# EAGLE board 1u_mixer_panel (EAGLE 9.6.2), part 1 of 2
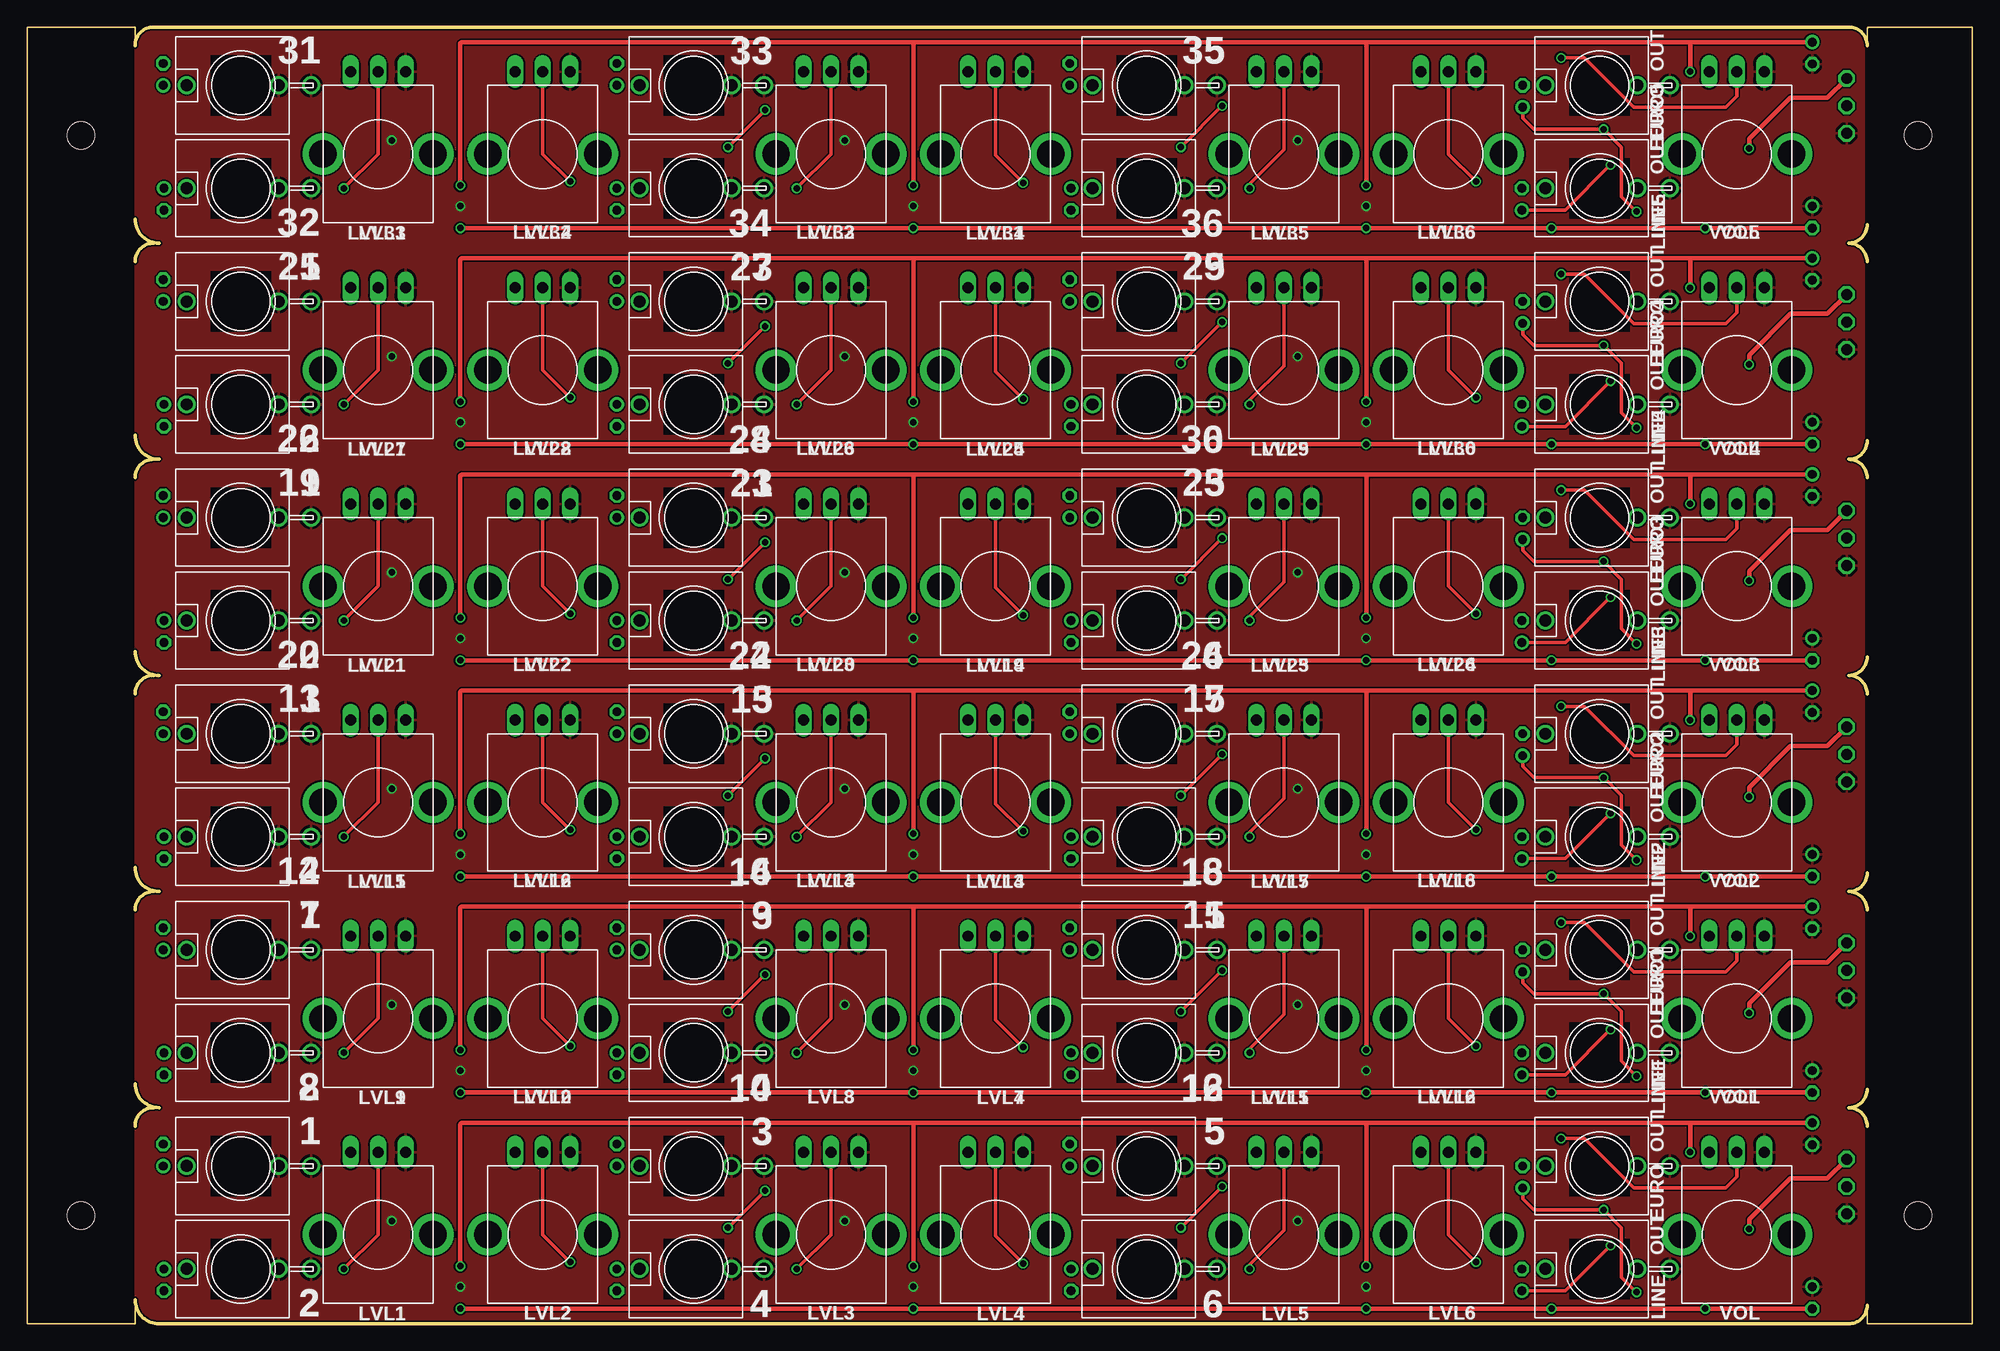
[diagram p0: board, top side]
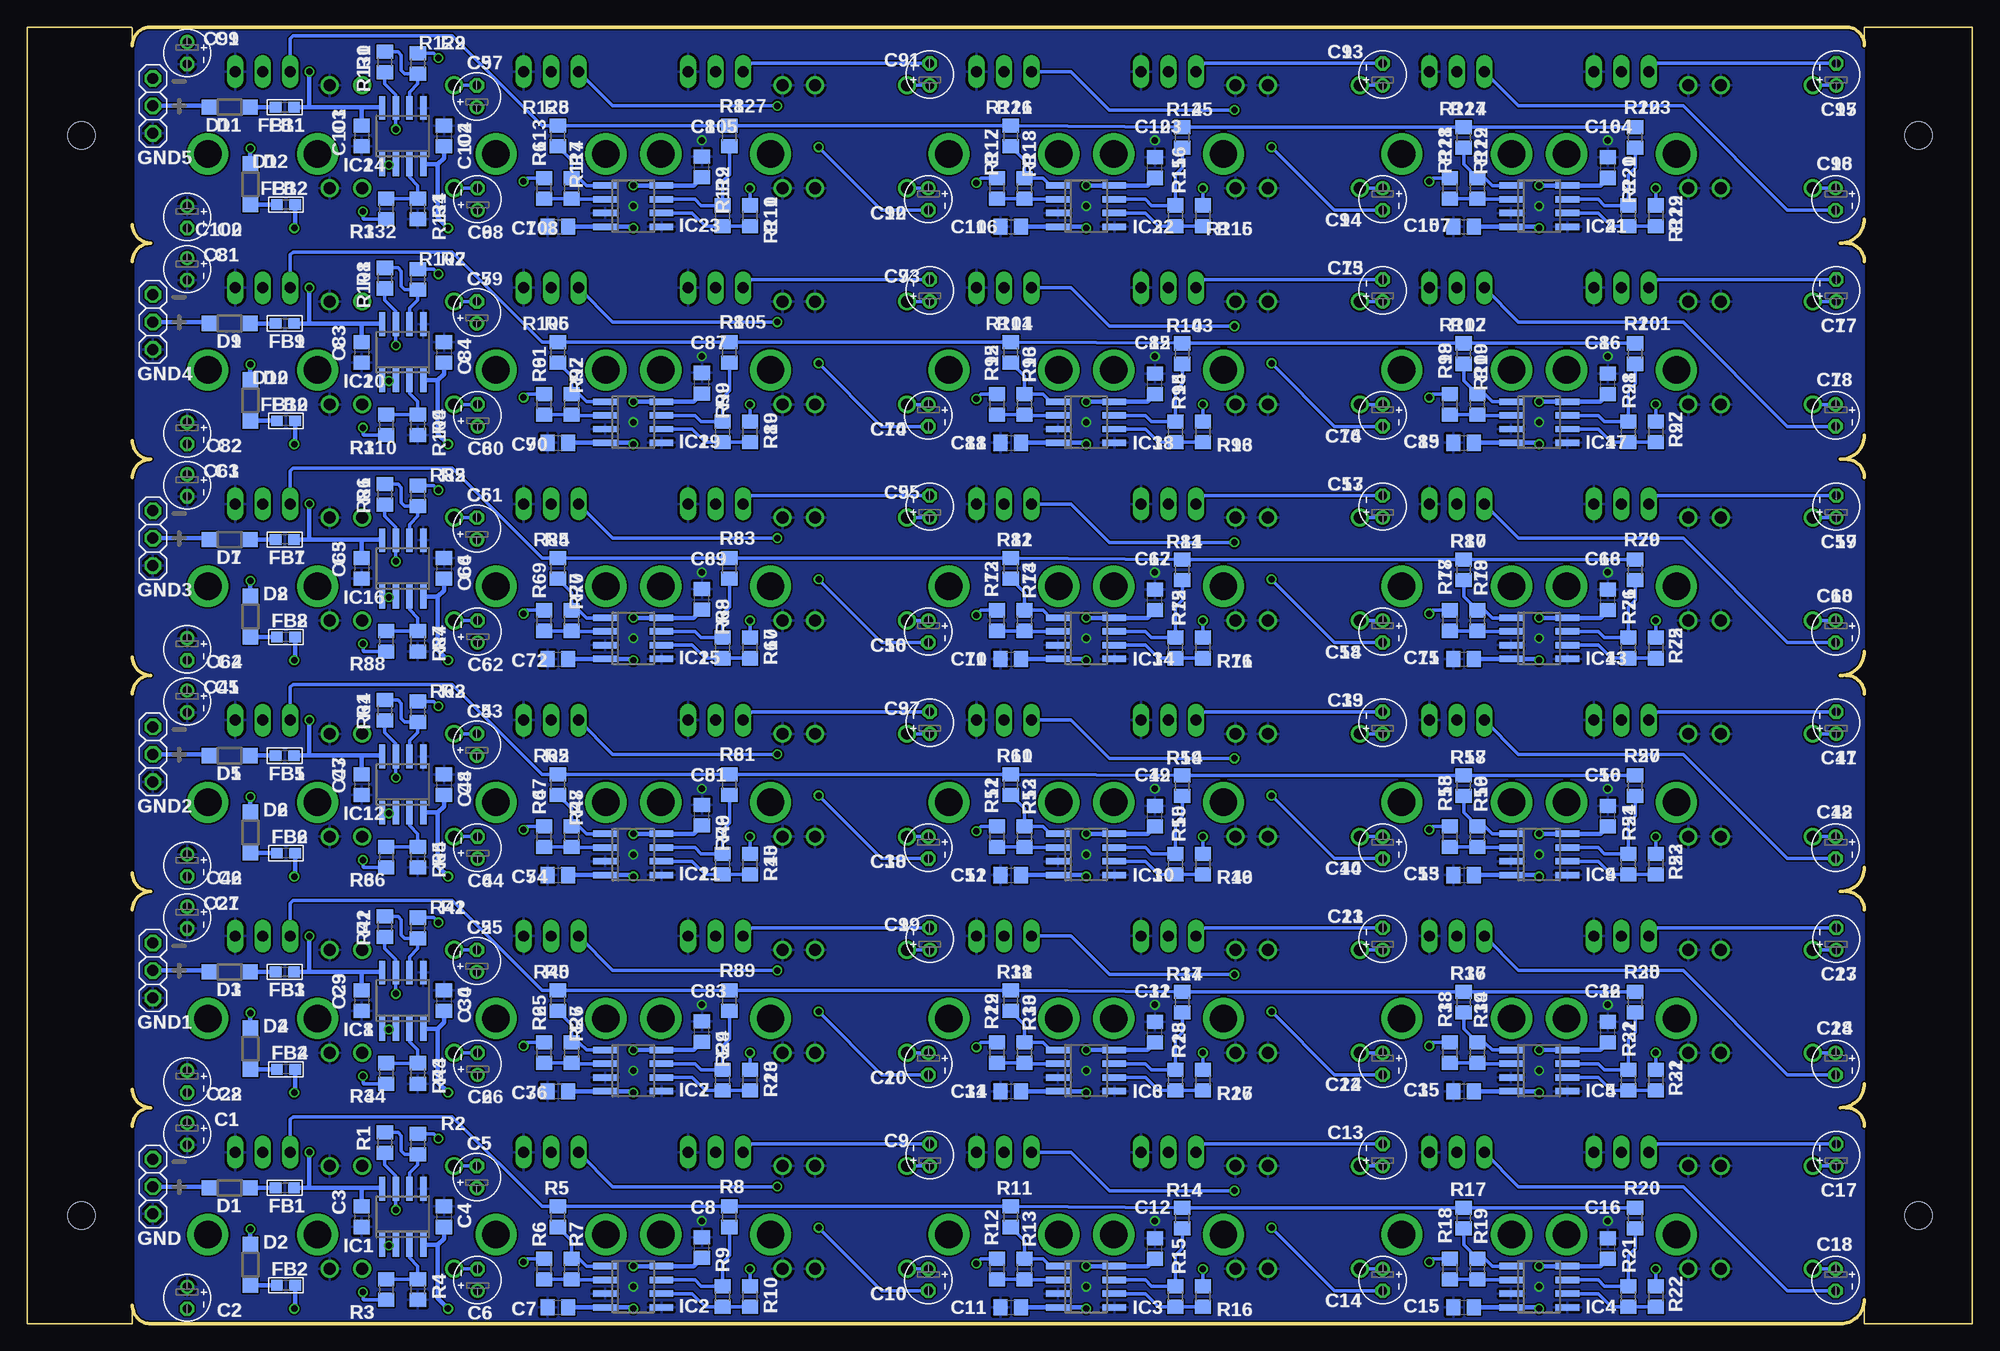
[diagram p1: board, bottom side, seen from below]

Size 180.03 x 120.02 mm. Coordinates in mm from the lower left corner, seen from the top.
Outline: 10,2.22 arc90 12.23,0 168.56,0 arc90 170.28,1.71
Outline: 10,18.29 arc-90 11.72,20
Outline: 170.28,18.29 arc90 168.56,20 arc90 170.28,21.72
Outline: 10,22.23 arc90 12.23,20
Outline: 10,38.29 arc-90 11.72,40.01
Outline: 170.28,38.29 arc90 168.56,40.01 arc90 170.28,41.72
Outline: 10,42.23 arc90 12.23,40.01
Outline: 10,58.29 arc-90 11.72,60.01
Outline: 170.28,58.29 arc90 168.56,60.01 arc90 170.28,61.72
Outline: 10,62.23 arc90 12.23,60.01
Outline: 10,78.3 arc-90 11.72,80.01
Outline: 170.28,78.3 arc90 168.56,80.01 arc90 170.28,81.72
Outline: 10,82.23 arc90 12.23,80.01
Outline: 10,98.3 arc-90 11.72,100.01
Outline: 170.28,98.3 arc90 168.56,100.01 arc90 170.28,101.73
Outline: 10,102.23 arc90 12.23,100.01
Outline: 10,118.3 arc-90 11.72,120.02 168.56,120.02 arc-90 170.28,118.3
Outline: 0,120.02 0,0
Outline: 180.03,120.02 180.03,0
Outline: 0,120 10,120 10,118.36
Outline: 180,120 170.39,120 170.28,119.89 170.28,118.36
Outline: 180,0 170.28,0 170.28,1.65
Outline: 0,0 10,0 10,2.16
Copper layers (1*16): Top 0.035mm / dielectric 1.5mm / Bottom 0.035mm
Design rules "hackvana": minimum track width 6mil, minimum drill 0.3mm, track to track 6mil, track to pad 9mil, pad to pad 6mil, via to via 6mil, smd to smd 0mil, copper to edge 6mil, drill to drill 6mil, minimum pad ring 10mil, minimum via ring 6mil, stop-mask expansion 2mil, vias tented up to drill 100mil, thermal gap 10mil
Holes 2.54 mm at 5,110 5,10 175,110 175,10

## Footprints (pad centres in the part's own frame; a part is rotated, then mirrored left to right if it is on the bottom)
WQP-PJ301M-12_JACK = drill 1.1: P$1 0,5; P$2 0,-3.5; P$3 0,-6.5
1X01 = drill 1.016 octagon: 1 0,0
E2-4 = drill 0.813 pad 1.27: + -1.016,0 | drill 0.813 pad 1.27 octagon: - 1.016,0
C0805 = smd 1.3 x 1.5: 1 -0.95,0; 2 0.95,0
SOD123 = smd 1.4 x 1.4: A 1.9,0; C -1.9,0
0603 = smd 1.1 x 1: 1 -0.85,0; 2 0.85,0
SO08 = smd 0.6 x 2.2: 1 -1.905,-2.6; 2 -0.635,-2.6; 3 0.635,-2.6; 4 1.905,-2.6; 5 1.905,2.6; 6 0.635,2.6; 7 -0.635,2.6; 8 -1.905,2.6
SMALL_ALPS_POT = drill 1.016 long: A -2.54,-7.62; B 2.54,-7.62; W 0,-7.62 | drill 2.54 pad 3.81: GND@1 -5.08,0; GND@2 5.08,0
R0805 = smd 1.3 x 1.5: 1 -0.95,0; 2 0.95,0

## Placement (x,y rotation side)
1  WQP-PJ301M-12_JACK  [WQP-PJ301M-12_JACK]  19.78,14.61 90 top
2  WQP-PJ301M-12_JACK  [WQP-PJ301M-12_JACK]  19.78,5.08 90 top
3  WQP-PJ301M-12_JACK  [WQP-PJ301M-12_JACK]  61.69,14.61 90 top
4  WQP-PJ301M-12_JACK  [WQP-PJ301M-12_JACK]  61.69,5.08 90 top
5  WQP-PJ301M-12_JACK  [WQP-PJ301M-12_JACK]  103.6,14.61 90 top
6  WQP-PJ301M-12_JACK  [WQP-PJ301M-12_JACK]  103.6,5.08 90 top
7  WQP-PJ301M-12_JACK  [WQP-PJ301M-12_JACK]  19.78,34.61 90 top
8  WQP-PJ301M-12_JACK  [WQP-PJ301M-12_JACK]  19.78,25.08 90 top
9  WQP-PJ301M-12_JACK  [WQP-PJ301M-12_JACK]  61.69,34.61 90 top
10  WQP-PJ301M-12_JACK  [WQP-PJ301M-12_JACK]  61.69,25.08 90 top
11  WQP-PJ301M-12_JACK  [WQP-PJ301M-12_JACK]  103.6,34.61 90 top
12  WQP-PJ301M-12_JACK  [WQP-PJ301M-12_JACK]  103.6,25.08 90 top
13  WQP-PJ301M-12_JACK  [WQP-PJ301M-12_JACK]  19.78,54.61 90 top
14  WQP-PJ301M-12_JACK  [WQP-PJ301M-12_JACK]  19.78,45.09 90 top
15  WQP-PJ301M-12_JACK  [WQP-PJ301M-12_JACK]  61.69,54.61 90 top
16  WQP-PJ301M-12_JACK  [WQP-PJ301M-12_JACK]  61.69,45.09 90 top
17  WQP-PJ301M-12_JACK  [WQP-PJ301M-12_JACK]  103.6,54.61 90 top
18  WQP-PJ301M-12_JACK  [WQP-PJ301M-12_JACK]  103.6,45.09 90 top
19  WQP-PJ301M-12_JACK  [WQP-PJ301M-12_JACK]  19.78,74.61 90 top
20  WQP-PJ301M-12_JACK  [WQP-PJ301M-12_JACK]  19.78,65.09 90 top
21  WQP-PJ301M-12_JACK  [WQP-PJ301M-12_JACK]  61.69,74.61 90 top
22  WQP-PJ301M-12_JACK  [WQP-PJ301M-12_JACK]  61.69,65.09 90 top
23  WQP-PJ301M-12_JACK  [WQP-PJ301M-12_JACK]  103.6,74.61 90 top
24  WQP-PJ301M-12_JACK  [WQP-PJ301M-12_JACK]  103.6,65.09 90 top
25  WQP-PJ301M-12_JACK  [WQP-PJ301M-12_JACK]  19.78,94.61 90 top
26  WQP-PJ301M-12_JACK  [WQP-PJ301M-12_JACK]  19.78,85.09 90 top
27  WQP-PJ301M-12_JACK  [WQP-PJ301M-12_JACK]  61.69,94.61 90 top
28  WQP-PJ301M-12_JACK  [WQP-PJ301M-12_JACK]  61.69,85.09 90 top
29  WQP-PJ301M-12_JACK  [WQP-PJ301M-12_JACK]  103.6,94.61 90 top
30  WQP-PJ301M-12_JACK  [WQP-PJ301M-12_JACK]  103.6,85.09 90 top
31  WQP-PJ301M-12_JACK  [WQP-PJ301M-12_JACK]  19.78,114.62 90 top
32  WQP-PJ301M-12_JACK  [WQP-PJ301M-12_JACK]  19.78,105.09 90 top
33  WQP-PJ301M-12_JACK  [WQP-PJ301M-12_JACK]  61.69,114.62 90 top
34  WQP-PJ301M-12_JACK  [WQP-PJ301M-12_JACK]  61.69,105.09 90 top
35  WQP-PJ301M-12_JACK  [WQP-PJ301M-12_JACK]  103.6,114.62 90 top
36  WQP-PJ301M-12_JACK  [WQP-PJ301M-12_JACK]  103.6,105.09 90 top
+1  [1X01]  168.37,32.7 0 bottom
+2  [1X01]  168.37,52.7 0 bottom
+3  [1X01]  168.37,72.71 0 bottom
+4  [1X01]  168.37,92.71 0 bottom
+5  [1X01]  168.37,112.71 0 bottom
+12  [1X01]  168.37,12.7 0 bottom
-1  [1X01]  168.37,35.24 0 bottom
-2  [1X01]  168.37,55.24 0 bottom
-3  [1X01]  168.37,75.25 0 bottom
-4  [1X01]  168.37,95.25 0 bottom
-5  [1X01]  168.37,115.25 0 bottom
-12  [1X01]  168.37,15.24 0 bottom
C1  [E2-4]  165.2,17.59 270 bottom
C2  [E2-4]  165.2,2.41 270 bottom
C3  [C0805]  149.07,9.91 270 bottom
C4  [C0805]  141.45,9.91 270 bottom
C5  [E2-4]  138.4,13.59 90 bottom
C6  [E2-4]  138.34,4.06 90 bottom
C7  [C0805]  130.91,1.52 0 bottom
C8  [C0805]  117.57,7.05 90 bottom
C9  [E2-4]  96.49,15.62 90 bottom
C10  [E2-4]  96.62,4.06 270 bottom
C11  [C0805]  89,1.52 0 bottom
C12  [C0805]  75.66,6.99 90 bottom
C13  [E2-4]  54.58,15.62 90 bottom
C14  [E2-4]  54.58,4.06 270 bottom
C15  [C0805]  47.09,1.52 0 bottom
C16  [C0805]  33.75,6.99 90 bottom
C17  [E2-4]  12.61,15.62 90 bottom
C18  [E2-4]  12.67,4.06 270 bottom
C19  [E2-4]  96.49,35.62 90 bottom
C20  [E2-4]  96.62,24.07 270 bottom
C21  [E2-4]  54.58,35.62 90 bottom
C22  [E2-4]  54.58,24.07 270 bottom
C23  [E2-4]  12.61,35.62 90 bottom
C24  [E2-4]  12.67,24.07 270 bottom
C25  [E2-4]  138.4,33.59 90 bottom
C26  [E2-4]  138.34,24.07 90 bottom
C27  [E2-4]  165.2,37.59 270 bottom
C28  [E2-4]  165.2,22.42 270 bottom
C29  [C0805]  149.07,29.91 270 bottom
C30  [C0805]  141.45,29.91 270 bottom
C31  [C0805]  75.66,26.99 90 bottom
C32  [C0805]  33.75,26.99 90 bottom
C33  [C0805]  117.57,27.05 90 bottom
C34  [C0805]  89,21.53 0 bottom
C35  [C0805]  47.09,21.53 0 bottom
C36  [C0805]  130.91,21.53 0 bottom
C37  [E2-4]  96.49,55.63 90 bottom
C38  [E2-4]  96.62,44.07 270 bottom
C39  [E2-4]  54.58,55.63 90 bottom
C40  [E2-4]  54.58,44.07 270 bottom
C41  [E2-4]  12.61,55.63 90 bottom
C42  [E2-4]  12.67,44.07 270 bottom
C43  [E2-4]  138.4,53.59 90 bottom
C44  [E2-4]  138.34,44.07 90 bottom
C45  [E2-4]  165.2,57.59 270 bottom
C46  [E2-4]  165.2,42.42 270 bottom
C47  [C0805]  149.07,49.91 270 bottom
C48  [C0805]  141.45,49.91 270 bottom
C49  [C0805]  75.66,46.99 90 bottom
C50  [C0805]  33.75,46.99 90 bottom
C51  [C0805]  117.57,47.05 90 bottom
C52  [C0805]  89,41.53 0 bottom
C53  [C0805]  47.09,41.53 0 bottom
C54  [C0805]  130.91,41.53 0 bottom
C55  [E2-4]  96.49,75.63 90 bottom
C56  [E2-4]  96.62,64.07 270 bottom
C57  [E2-4]  54.58,75.63 90 bottom
C58  [E2-4]  54.58,64.07 270 bottom
C59  [E2-4]  12.61,75.63 90 bottom
C60  [E2-4]  12.67,64.07 270 bottom
C61  [E2-4]  138.4,73.6 90 bottom
C62  [E2-4]  138.34,64.07 90 bottom
C63  [E2-4]  165.2,77.6 270 bottom
C64  [E2-4]  165.2,62.42 270 bottom
C65  [C0805]  149.07,69.91 270 bottom
C66  [C0805]  141.45,69.91 270 bottom
C67  [C0805]  75.66,66.99 90 bottom
C68  [C0805]  33.75,66.99 90 bottom
C69  [C0805]  117.57,67.06 90 bottom
C70  [C0805]  89,61.53 0 bottom
C71  [C0805]  47.09,61.53 0 bottom
C72  [C0805]  130.91,61.53 0 bottom
C73  [E2-4]  96.49,95.63 90 bottom
C74  [E2-4]  96.62,84.07 270 bottom
C75  [E2-4]  54.58,95.63 90 bottom
C76  [E2-4]  54.58,84.07 270 bottom
C77  [E2-4]  12.61,95.63 90 bottom
C78  [E2-4]  12.67,84.07 270 bottom
C79  [E2-4]  138.4,93.6 90 bottom
C80  [E2-4]  138.34,84.07 90 bottom
C81  [E2-4]  165.2,97.6 270 bottom
C82  [E2-4]  165.2,82.42 270 bottom
C83  [C0805]  149.07,89.92 270 bottom
C84  [C0805]  141.45,89.92 270 bottom
C85  [C0805]  75.66,87 90 bottom
C86  [C0805]  33.75,87 90 bottom
C87  [C0805]  117.57,87.06 90 bottom
C88  [C0805]  89,81.53 0 bottom
C89  [C0805]  47.09,81.53 0 bottom
C90  [C0805]  130.91,81.53 0 bottom
C91  [E2-4]  96.49,115.63 90 bottom
C92  [E2-4]  96.62,104.08 270 bottom
C93  [E2-4]  54.58,115.63 90 bottom
C94  [E2-4]  54.58,104.08 270 bottom
C95  [E2-4]  12.61,115.63 90 bottom
C96  [E2-4]  12.67,104.08 270 bottom
C97  [E2-4]  138.4,113.6 90 bottom
C98  [E2-4]  138.34,104.08 90 bottom
C99  [E2-4]  165.2,117.6 270 bottom
C100  [E2-4]  165.2,102.43 270 bottom
C101  [C0805]  149.07,109.92 270 bottom
C102  [C0805]  141.45,109.92 270 bottom
C103  [C0805]  75.66,107 90 bottom
C104  [C0805]  33.75,107 90 bottom
C105  [C0805]  117.57,107.06 90 bottom
C106  [C0805]  89,101.54 0 bottom
C107  [C0805]  47.09,101.54 0 bottom
C108  [C0805]  130.91,101.54 0 bottom
D1  MBR0520LT  [SOD123]  161.26,12.57 180 bottom
D2  MBR0520LT  [SOD123]  159.35,5.46 270 bottom
D3  MBR0520LT  [SOD123]  161.26,32.58 180 bottom
D4  MBR0520LT  [SOD123]  159.35,25.46 270 bottom
D5  MBR0520LT  [SOD123]  161.26,52.58 180 bottom
D6  MBR0520LT  [SOD123]  159.35,45.47 270 bottom
D7  MBR0520LT  [SOD123]  161.26,72.58 180 bottom
D8  MBR0520LT  [SOD123]  159.35,65.47 270 bottom
D9  MBR0520LT  [SOD123]  161.26,92.58 180 bottom
D10  MBR0520LT  [SOD123]  159.35,85.47 270 bottom
D11  MBR0520LT  [SOD123]  161.26,112.59 180 bottom
D12  MBR0520LT  [SOD123]  159.35,105.47 270 bottom
EURO  WQP-PJ301M-12_JACK  [WQP-PJ301M-12_JACK]  145.51,14.61 90 top
EURO1  WQP-PJ301M-12_JACK  [WQP-PJ301M-12_JACK]  145.51,34.61 90 top
EURO2  WQP-PJ301M-12_JACK  [WQP-PJ301M-12_JACK]  145.51,54.61 90 top
EURO3  WQP-PJ301M-12_JACK  [WQP-PJ301M-12_JACK]  145.51,74.61 90 top
EURO4  WQP-PJ301M-12_JACK  [WQP-PJ301M-12_JACK]  145.51,94.61 90 top
EURO5  WQP-PJ301M-12_JACK  [WQP-PJ301M-12_JACK]  145.51,114.62 90 top
FB1  [0603]  156.18,12.57 180 bottom
FB2  [0603]  156.05,3.56 180 bottom
FB3  [0603]  156.18,32.58 180 bottom
FB4  [0603]  156.05,23.56 180 bottom
FB5  [0603]  156.18,52.58 180 bottom
FB6  [0603]  156.05,43.56 180 bottom
FB7  [0603]  156.18,72.58 180 bottom
FB8  [0603]  156.05,63.56 180 bottom
FB9  [0603]  156.18,92.58 180 bottom
FB10  [0603]  156.05,83.57 180 bottom
FB11  [0603]  156.18,112.59 180 bottom
FB12  [0603]  156.05,103.57 180 bottom
GND  [1X01]  168.37,10.16 0 bottom
GND1  [1X01]  168.37,30.16 0 bottom
GND2  [1X01]  168.37,50.16 0 bottom
GND3  [1X01]  168.37,70.17 0 bottom
GND4  [1X01]  168.37,90.17 0 bottom
GND5  [1X01]  168.37,110.17 0 bottom
IC1  TL072D  [SO08]  145.26,9.91 0 bottom
IC2  TL072D  [SO08]  123.92,3.43 270 bottom
IC3  TL072D  [SO08]  82.01,3.43 270 bottom
IC4  TL072D  [SO08]  40.1,3.43 270 bottom
IC5  TL072D  [SO08]  40.1,23.43 270 bottom
IC6  TL072D  [SO08]  82.01,23.43 270 bottom
IC7  TL072D  [SO08]  123.92,23.43 270 bottom
IC8  TL072D  [SO08]  145.26,29.91 0 bottom
IC9  TL072D  [SO08]  40.1,43.43 270 bottom
IC10  TL072D  [SO08]  82.01,43.43 270 bottom
IC11  TL072D  [SO08]  123.92,43.43 270 bottom
IC12  TL072D  [SO08]  145.26,49.91 0 bottom
IC13  TL072D  [SO08]  40.1,63.44 270 bottom
IC14  TL072D  [SO08]  82.01,63.44 270 bottom
IC15  TL072D  [SO08]  123.92,63.44 270 bottom
IC16  TL072D  [SO08]  145.26,69.91 0 bottom
IC17  TL072D  [SO08]  40.1,83.44 270 bottom
IC18  TL072D  [SO08]  82.01,83.44 270 bottom
IC19  TL072D  [SO08]  123.92,83.44 270 bottom
IC20  TL072D  [SO08]  145.26,89.92 0 bottom
IC21  TL072D  [SO08]  40.1,103.44 270 bottom
IC22  TL072D  [SO08]  82.01,103.44 270 bottom
IC23  TL072D  [SO08]  123.92,103.44 270 bottom
IC24  TL072D  [SO08]  145.26,109.92 0 bottom
LINE  WQP-PJ301M-12_JACK  [WQP-PJ301M-12_JACK]  145.51,5.08 90 top
LINE1  WQP-PJ301M-12_JACK  [WQP-PJ301M-12_JACK]  145.51,25.08 90 top
LINE2  WQP-PJ301M-12_JACK  [WQP-PJ301M-12_JACK]  145.51,45.09 90 top
LINE3  WQP-PJ301M-12_JACK  [WQP-PJ301M-12_JACK]  145.51,65.09 90 top
LINE4  WQP-PJ301M-12_JACK  [WQP-PJ301M-12_JACK]  145.51,85.09 90 top
LINE5  WQP-PJ301M-12_JACK  [WQP-PJ301M-12_JACK]  145.51,105.09 90 top
LVL1  ALPS_POT_SMALL  [SMALL_ALPS_POT]  32.48,8.26 180 top
LVL2  ALPS_POT_SMALL  [SMALL_ALPS_POT]  47.72,8.26 180 top
LVL3  ALPS_POT_SMALL  [SMALL_ALPS_POT]  74.39,8.26 180 top
LVL4  ALPS_POT_SMALL  [SMALL_ALPS_POT]  89.63,8.26 180 top
LVL5  ALPS_POT_SMALL  [SMALL_ALPS_POT]  116.3,8.26 180 top
LVL6  ALPS_POT_SMALL  [SMALL_ALPS_POT]  131.54,8.26 180 top
LVL7  ALPS_POT_SMALL  [SMALL_ALPS_POT]  89.63,28.26 180 top
LVL8  ALPS_POT_SMALL  [SMALL_ALPS_POT]  74.39,28.26 180 top
LVL9  ALPS_POT_SMALL  [SMALL_ALPS_POT]  32.48,28.26 180 top
LVL10  ALPS_POT_SMALL  [SMALL_ALPS_POT]  47.72,28.26 180 top
LVL11  ALPS_POT_SMALL  [SMALL_ALPS_POT]  116.3,28.26 180 top
LVL12  ALPS_POT_SMALL  [SMALL_ALPS_POT]  131.54,28.26 180 top
LVL13  ALPS_POT_SMALL  [SMALL_ALPS_POT]  89.63,48.26 180 top
LVL14  ALPS_POT_SMALL  [SMALL_ALPS_POT]  74.39,48.26 180 top
LVL15  ALPS_POT_SMALL  [SMALL_ALPS_POT]  32.48,48.26 180 top
LVL16  ALPS_POT_SMALL  [SMALL_ALPS_POT]  47.72,48.26 180 top
LVL17  ALPS_POT_SMALL  [SMALL_ALPS_POT]  116.3,48.26 180 top
LVL18  ALPS_POT_SMALL  [SMALL_ALPS_POT]  131.54,48.26 180 top
LVL19  ALPS_POT_SMALL  [SMALL_ALPS_POT]  89.63,68.26 180 top
LVL20  ALPS_POT_SMALL  [SMALL_ALPS_POT]  74.39,68.26 180 top
LVL21  ALPS_POT_SMALL  [SMALL_ALPS_POT]  32.48,68.26 180 top
LVL22  ALPS_POT_SMALL  [SMALL_ALPS_POT]  47.72,68.26 180 top
LVL23  ALPS_POT_SMALL  [SMALL_ALPS_POT]  116.3,68.26 180 top
LVL24  ALPS_POT_SMALL  [SMALL_ALPS_POT]  131.54,68.26 180 top
LVL25  ALPS_POT_SMALL  [SMALL_ALPS_POT]  89.63,88.27 180 top
LVL26  ALPS_POT_SMALL  [SMALL_ALPS_POT]  74.39,88.27 180 top
LVL27  ALPS_POT_SMALL  [SMALL_ALPS_POT]  32.48,88.27 180 top
LVL28  ALPS_POT_SMALL  [SMALL_ALPS_POT]  47.72,88.27 180 top
LVL29  ALPS_POT_SMALL  [SMALL_ALPS_POT]  116.3,88.27 180 top
LVL30  ALPS_POT_SMALL  [SMALL_ALPS_POT]  131.54,88.27 180 top
LVL31  ALPS_POT_SMALL  [SMALL_ALPS_POT]  89.63,108.27 180 top
LVL32  ALPS_POT_SMALL  [SMALL_ALPS_POT]  74.39,108.27 180 top
LVL33  ALPS_POT_SMALL  [SMALL_ALPS_POT]  32.48,108.27 180 top
LVL34  ALPS_POT_SMALL  [SMALL_ALPS_POT]  47.72,108.27 180 top
LVL35  ALPS_POT_SMALL  [SMALL_ALPS_POT]  116.3,108.27 180 top
LVL36  ALPS_POT_SMALL  [SMALL_ALPS_POT]  131.54,108.27 180 top
R1  100k  [R0805]  146.91,16.76 270 bottom
R2  10k  [R0805]  143.86,16.64 270 bottom
R3  47k  [R0805]  146.78,3.17 90 bottom
R4  10k  [R0805]  143.86,3.17 90 bottom
R5  [R0805]  130.91,9.91 90 bottom
R6  4k7  [R0805]  132.18,5.08 270 bottom
R7  10k  [R0805]  129.64,5.08 90 bottom
R8  [R0805]  115.03,9.91 90 bottom
R9  10k  [R0805]  115.67,2.54 90 bottom
R10  4k7  [R0805]  113.13,2.54 270 bottom
R11  [R0805]  89,9.91 90 bottom
R12  4k7  [R0805]  90.27,5.08 270 bottom
R13  10k  [R0805]  87.73,5.08 90 bottom
R14  [R0805]  73.12,9.78 90 bottom
R15  10k  [R0805]  73.76,2.54 90 bottom
R16  4k7  [R0805]  71.22,2.54 270 bottom
R17  [R0805]  47.09,9.78 90 bottom
R18  4k7  [R0805]  48.36,5.08 270 bottom
R19  10k  [R0805]  45.82,5.08 90 bottom
R20  [R0805]  31.21,9.78 90 bottom
R21  10k  [R0805]  31.85,2.54 90 bottom
R22  4k7  [R0805]  29.31,2.54 270 bottom
R23  4k7  [R0805]  113.13,22.54 270 bottom
R24  10k  [R0805]  115.67,22.54 90 bottom
R25  4k7  [R0805]  132.18,25.08 270 bottom
R26  10k  [R0805]  129.64,25.08 90 bottom
R27  4k7  [R0805]  71.22,22.54 270 bottom
R28  10k  [R0805]  73.76,22.54 90 bottom
R29  4k7  [R0805]  90.27,25.08 270 bottom
R30  10k  [R0805]  87.73,25.08 90 bottom
R31  4k7  [R0805]  29.31,22.54 270 bottom
R32  10k  [R0805]  31.85,22.54 90 bottom
R33  4k7  [R0805]  48.36,25.08 270 bottom
R34  10k  [R0805]  45.82,25.08 90 bottom
R35  [R0805]  31.21,29.78 90 bottom
R36  [R0805]  47.09,29.78 90 bottom
R37  [R0805]  73.12,29.78 90 bottom
R38  [R0805]  89,29.91 90 bottom
R39  [R0805]  115.03,29.91 90 bottom
R40  [R0805]  130.91,29.91 90 bottom
R41  10k  [R0805]  143.86,36.64 270 bottom
R42  100k  [R0805]  146.91,36.77 270 bottom
R43  10k  [R0805]  143.86,23.18 90 bottom
R44  47k  [R0805]  146.78,23.18 90 bottom
R45  4k7  [R0805]  113.13,42.55 270 bottom
R46  10k  [R0805]  115.67,42.55 90 bottom
R47  4k7  [R0805]  132.18,45.09 270 bottom
R48  10k  [R0805]  129.64,45.09 90 bottom
R49  4k7  [R0805]  71.22,42.55 270 bottom
R50  10k  [R0805]  73.76,42.55 90 bottom
R51  4k7  [R0805]  90.27,45.09 270 bottom
R52  10k  [R0805]  87.73,45.09 90 bottom
R53  4k7  [R0805]  29.31,42.55 270 bottom
R54  10k  [R0805]  31.85,42.55 90 bottom
R55  4k7  [R0805]  48.36,45.09 270 bottom
R56  10k  [R0805]  45.82,45.09 90 bottom
R57  [R0805]  31.21,49.78 90 bottom
R58  [R0805]  47.09,49.78 90 bottom
R59  [R0805]  73.12,49.78 90 bottom
R60  [R0805]  89,49.91 90 bottom
R61  [R0805]  115.03,49.91 90 bottom
R62  [R0805]  130.91,49.91 90 bottom
R63  10k  [R0805]  143.86,56.64 270 bottom
R64  100k  [R0805]  146.91,56.77 270 bottom
R65  10k  [R0805]  143.86,43.18 90 bottom
R66  47k  [R0805]  146.78,43.18 90 bottom
R67  4k7  [R0805]  113.13,62.55 270 bottom
R68  10k  [R0805]  115.67,62.55 90 bottom
R69  4k7  [R0805]  132.18,65.09 270 bottom
R70  10k  [R0805]  129.64,65.09 90 bottom
R71  4k7  [R0805]  71.22,62.55 270 bottom
R72  10k  [R0805]  73.76,62.55 90 bottom
R73  4k7  [R0805]  90.27,65.09 270 bottom
R74  10k  [R0805]  87.73,65.09 90 bottom
R75  4k7  [R0805]  29.31,62.55 270 bottom
R76  10k  [R0805]  31.85,62.55 90 bottom
R77  4k7  [R0805]  48.36,65.09 270 bottom
R78  10k  [R0805]  45.82,65.09 90 bottom
R79  [R0805]  31.21,69.79 90 bottom
R80  [R0805]  47.09,69.79 90 bottom
R81  [R0805]  73.12,69.79 90 bottom
R82  [R0805]  89,69.91 90 bottom
R83  [R0805]  115.03,69.91 90 bottom
R84  [R0805]  130.91,69.91 90 bottom
R85  10k  [R0805]  143.86,76.64 270 bottom
R86  100k  [R0805]  146.91,76.77 270 bottom
R87  10k  [R0805]  143.86,63.18 90 bottom
R88  47k  [R0805]  146.78,63.18 90 bottom
R89  4k7  [R0805]  113.13,82.55 270 bottom
R90  10k  [R0805]  115.67,82.55 90 bottom
R91  4k7  [R0805]  132.18,85.09 270 bottom
R92  10k  [R0805]  129.64,85.09 90 bottom
R93  4k7  [R0805]  71.22,82.55 270 bottom
R94  10k  [R0805]  73.76,82.55 90 bottom
R95  4k7  [R0805]  90.27,85.09 270 bottom
R96  10k  [R0805]  87.73,85.09 90 bottom
R97  4k7  [R0805]  29.31,82.55 270 bottom
R98  10k  [R0805]  31.85,82.55 90 bottom
R99  4k7  [R0805]  48.36,85.09 270 bottom
R100  10k  [R0805]  45.82,85.09 90 bottom
R101  [R0805]  31.21,89.79 90 bottom
R102  [R0805]  47.09,89.79 90 bottom
R103  [R0805]  73.12,89.79 90 bottom
R104  [R0805]  89,89.92 90 bottom
R105  [R0805]  115.03,89.92 90 bottom
R106  [R0805]  130.91,89.92 90 bottom
R107  10k  [R0805]  143.86,96.65 270 bottom
R108  100k  [R0805]  146.91,96.77 270 bottom
R109  10k  [R0805]  143.86,83.19 90 bottom
R110  47k  [R0805]  146.78,83.19 90 bottom
R111  4k7  [R0805]  113.13,102.55 270 bottom
R112  10k  [R0805]  115.67,102.55 90 bottom
R113  4k7  [R0805]  132.18,105.09 270 bottom
R114  10k  [R0805]  129.64,105.09 90 bottom
R115  4k7  [R0805]  71.22,102.55 270 bottom
R116  10k  [R0805]  73.76,102.55 90 bottom
R117  4k7  [R0805]  90.27,105.09 270 bottom
R118  10k  [R0805]  87.73,105.09 90 bottom
R119  4k7  [R0805]  29.31,102.55 270 bottom
R120  10k  [R0805]  31.85,102.55 90 bottom
R121  4k7  [R0805]  48.36,105.09 270 bottom
R122  10k  [R0805]  45.82,105.09 90 bottom
R123  [R0805]  31.21,109.79 90 bottom
R124  [R0805]  47.09,109.79 90 bottom
R125  [R0805]  73.12,109.79 90 bottom
R126  [R0805]  89,109.92 90 bottom
R127  [R0805]  115.03,109.92 90 bottom
R128  [R0805]  130.91,109.92 90 bottom
R129  10k  [R0805]  143.86,116.65 270 bottom
R130  100k  [R0805]  146.91,116.78 270 bottom
R131  10k  [R0805]  143.86,103.19 90 bottom
R132  47k  [R0805]  146.78,103.19 90 bottom
VOL  ALPS_POT_SMALL  [SMALL_ALPS_POT]  158.21,8.26 180 top
VOL1  ALPS_POT_SMALL  [SMALL_ALPS_POT]  158.21,28.26 180 top
VOL2  ALPS_POT_SMALL  [SMALL_ALPS_POT]  158.21,48.26 180 top
VOL3  ALPS_POT_SMALL  [SMALL_ALPS_POT]  158.21,68.26 180 top
VOL4  ALPS_POT_SMALL  [SMALL_ALPS_POT]  158.21,88.27 180 top
VOL5  ALPS_POT_SMALL  [SMALL_ALPS_POT]  158.21,108.27 180 top

## Library data of the parts
1-36 EURO EURO1-EURO5 LINE LINE1-LINE5 = thonkiconn
+1-+5 +12 -1--5 -12 GND GND1-GND5 = pinhead
C1 C2 C5 C6 C9 C10 C13 C14 C17-C28 C37-C46 C55-C64 C73-C82 C91-C100 = resistor
C3 C4 C7 C8 C11 C12 C15 C16 C29-C36 C47-C54 C65-C72 C83-C90 C101-C108 R1-R132 = rcl
D1-D12 = diode
FB1-FB12 = microbuilder
IC1-IC24 = linear
LVL1-LVL36 VOL VOL1-VOL5 = jasons_stuff

## Nets
+12V: C1.+ C3.1 C8.1 C12.1 C16.1 FB1.1 IC1.8 IC2.8 IC3.8 IC4.8
+12V1: C27.+ C29.1 C31.1 C32.1 C33.1 FB3.1 IC5.8 IC6.8 IC7.8 IC8.8
+12V2: C45.+ C47.1 C49.1 C50.1 C51.1 FB5.1 IC9.8 IC10.8 IC11.8 IC12.8
+12V3: C63.+ C65.1 C67.1 C68.1 C69.1 FB7.1 IC13.8 IC14.8 IC15.8 IC16.8
+12V4: C81.+ C83.1 C85.1 C86.1 C87.1 FB9.1 IC17.8 IC18.8 IC19.8 IC20.8
+12V5: C99.+ C101.1 C103.1 C104.1 C105.1 FB11.1 IC21.8 IC22.8 IC23.8 IC24.8
-12V: C2.- C4.2 C7.2 C11.2 C15.2 FB2.1 IC1.4 IC2.4 IC3.4 IC4.4
-12V1: C28.- C30.2 C34.2 C35.2 C36.2 FB4.1 IC5.4 IC6.4 IC7.4 IC8.4
-12V2: C46.- C48.2 C52.2 C53.2 C54.2 FB6.1 IC9.4 IC10.4 IC11.4 IC12.4
-12V3: C64.- C66.2 C70.2 C71.2 C72.2 FB8.1 IC13.4 IC14.4 IC15.4 IC16.4
-12V4: C82.- C84.2 C88.2 C89.2 C90.2 FB10.1 IC17.4 IC18.4 IC19.4 IC20.4
-12V5: C100.- C102.2 C106.2 C107.2 C108.2 FB12.1 IC21.4 IC22.4 IC23.4 IC24.4
CH1: IC4.7 R20.1 R21.2
CH2: IC4.1 R17.1 R19.2
CH3: IC3.7 R14.1 R15.2
CH4: IC3.1 R11.1 R13.2
CH5: IC2.7 R8.1 R9.2
CH6: IC2.1 R5.1 R7.2
CH7: IC5.7 R32.2 R35.1
CH8: IC5.1 R34.2 R36.1
CH9: IC6.7 R28.2 R37.1
CH10: IC6.1 R30.2 R38.1
CH11: IC7.7 R24.2 R39.1
CH12: IC7.1 R26.2 R40.1
CH13: IC9.7 R54.2 R57.1
CH14: IC9.1 R56.2 R58.1
CH15: IC10.7 R50.2 R59.1
CH16: IC10.1 R52.2 R60.1
CH17: IC11.7 R46.2 R61.1
CH18: IC11.1 R48.2 R62.1
CH19: IC13.7 R76.2 R79.1
CH20: IC13.1 R78.2 R80.1
CH21: IC14.7 R72.2 R81.1
CH22: IC14.1 R74.2 R82.1
CH23: IC15.7 R68.2 R83.1
CH24: IC15.1 R70.2 R84.1
CH25: IC17.7 R98.2 R101.1
CH26: IC17.1 R100.2 R102.1
CH27: IC18.7 R94.2 R103.1
CH28: IC18.1 R96.2 R104.1
CH29: IC19.7 R90.2 R105.1
CH30: IC19.1 R92.2 R106.1
CH31: IC21.7 R120.2 R123.1
CH32: IC21.1 R122.2 R124.1
CH33: IC22.7 R116.2 R125.1
CH34: IC22.1 R118.2 R126.1
CH35: IC23.7 R112.2 R127.1
CH36: IC23.1 R114.2 R128.1
GND: 1.P$2 1.P$3 2.P$2 2.P$3 3.P$2 3.P$3 4.P$2 4.P$3 5.P$2 5.P$3 6.P$2 6.P$3 7.P$2 7.P$3 8.P$2 8.P$3 9.P$2 9.P$3 10.P$2 10.P$3 11.P$2 11.P$3 12.P$2 12.P$3 13.P$2 13.P$3 14.P$2 14.P$3 15.P$2 15.P$3 16.P$2 16.P$3 17.P$2 17.P$3 18.P$2 18.P$3 19.P$2 19.P$3 20.P$2 20.P$3 21.P$2 21.P$3 22.P$2 22.P$3 23.P$2 23.P$3 24.P$2 24.P$3 25.P$2 25.P$3 26.P$2 26.P$3 27.P$2 27.P$3 28.P$2 28.P$3 29.P$2 29.P$3 30.P$2 30.P$3 31.P$2 31.P$3 32.P$2 32.P$3 33.P$2 33.P$3 34.P$2 34.P$3 35.P$2 35.P$3 36.P$2 36.P$3 C1.- C2.+ C3.2 C4.1 C7.1 C8.2 C11.1 C12.2 C15.1 C16.2 C27.- C28.+ C29.2 C30.1 C31.2 C32.2 C33.2 C34.1 C35.1 C36.1 C45.- C46.+ C47.2 C48.1 C49.2 C50.2 C51.2 C52.1 C53.1 C54.1 C63.- C64.+ C65.2 C66.1 C67.2 C68.2 C69.2 C70.1 C71.1 C72.1 C81.- C82.+ C83.2 C84.1 C85.2 C86.2 C87.2 C88.1 C89.1 C90.1 C99.- C100.+ C101.2 C102.1 C103.2 C104.2 C105.2 C106.1 C107.1 C108.1 EURO1.P$3 EURO2.P$3 EURO3.P$3 EURO4.P$3 EURO5.P$3 EURO.P$3 GND1.1 GND2.1 GND3.1 GND4.1 GND5.1 GND.1 IC1.5 IC2.3 IC2.5 IC3.3 IC3.5 IC4.3 IC4.5 IC5.3 IC5.5 IC6.3 IC6.5 IC7.3 IC7.5 IC8.5 IC9.3 IC9.5 IC10.3 IC10.5 IC11.3 IC11.5 IC12.5 IC13.3 IC13.5 IC14.3 IC14.5 IC15.3 IC15.5 IC16.5 IC17.3 IC17.5 IC18.3 IC18.5 IC19.3 IC19.5 IC20.5 IC21.3 IC21.5 IC22.3 IC22.5 IC23.3 IC23.5 IC24.5 LINE1.P$3 LINE2.P$3 LINE3.P$3 LINE4.P$3 LINE5.P$3 LINE.P$3 LVL1.A LVL2.A LVL3.A LVL4.A LVL5.A LVL6.A LVL7.A LVL8.A LVL9.A LVL10.A LVL11.A LVL12.A LVL13.A LVL14.A LVL15.A LVL16.A LVL17.A LVL18.A LVL19.A LVL20.A LVL21.A LVL22.A LVL23.A LVL24.A LVL25.A LVL26.A LVL27.A LVL28.A LVL29.A LVL30.A LVL31.A LVL32.A LVL33.A LVL34.A LVL35.A LVL36.A R4.1 R43.1 R65.1 R87.1 R109.1 R131.1 VOL1.A VOL2.A VOL3.A VOL4.A VOL5.A VOL.A
N$1: 5.P$1 C9.+
N$2: C9.- LVL5.B
N$3: IC2.6 R9.1 R10.2
N$4: LVL5.W R10.1
N$5: 6.P$1 C10.+
N$6: C10.- LVL6.B
N$7: IC2.2 R6.2 R7.1
N$8: LVL6.W R6.1
N$9: 3.P$1 C13.+
N$10: C13.- LVL3.B
N$11: IC3.6 R15.1 R16.2
N$12: LVL3.W R16.1
N$13: 4.P$1 C14.+
N$14: C14.- LVL4.B
N$15: IC3.2 R12.2 R13.1
N$16: LVL4.W R12.1
N$17: 1.P$1 C17.+
N$18: C17.- LVL1.B
N$19: IC4.6 R21.1 R22.2
N$20: LVL1.W R22.1
N$21: 2.P$1 C18.+
N$22: C18.- LVL2.B
N$23: IC4.2 R18.2 R19.1
N$24: LVL2.W R18.1
N$25: R5.2 R8.2 R11.2 R14.2 R17.2 R20.2 VOL.B
N$26: C5.- EURO.P$1
N$27: C6.- LINE.P$1
N$28: R2.1 VOL.W
N$29: IC1.6 R1.1 R2.2
N$30: C5.+ IC1.7 R1.2 R3.1
N$31: D1.C FB1.2
N$32: C6.+ IC1.1 IC1.2
N$33: IC1.3 R3.2 R4.2
N$34: +12.1 D1.A
N$35: D2.A FB2.2
N$36: -12.1 D2.C
N$37: C19.- LVL11.B
N$38: IC7.6 R23.2 R24.1
N$39: 12.P$1 C20.+
N$40: C20.- LVL12.B
N$41: IC7.2 R25.2 R26.1
N$42: LVL12.W R25.1
N$43: 9.P$1 C21.+
N$44: C21.- LVL8.B
N$45: IC6.6 R27.2 R28.1
N$46: LVL8.W R27.1
N$47: 10.P$1 C22.+
N$48: C22.- LVL7.B
N$49: IC6.2 R29.2 R30.1
N$50: LVL7.W R29.1
N$51: 7.P$1 C23.+
N$52: C23.- LVL9.B
N$53: IC5.6 R31.2 R32.1
N$54: LVL9.W R31.1
N$55: 8.P$1 C24.+
N$56: C24.- LVL10.B
N$57: IC5.2 R33.2 R34.1
N$58: LVL10.W R33.1
N$59: LVL11.W R23.1
N$60: 11.P$1 C19.+
N$61: R35.2 R36.2 R37.2 R38.2 R39.2 R40.2 VOL1.B
N$62: R41.1 VOL1.W
N$63: IC8.6 R41.2 R42.1
N$64: C25.+ IC8.7 R42.2 R44.1
N$65: C25.- EURO1.P$1
N$66: C26.- LINE1.P$1
N$67: C26.+ IC8.1 IC8.2
N$68: IC8.3 R43.2 R44.2
N$69: D3.C FB3.2
N$70: +1.1 D3.A
N$71: D4.A FB4.2
N$72: -1.1 D4.C
N$73: C37.- LVL17.B
N$74: IC11.6 R45.2 R46.1
N$75: 18.P$1 C38.+
N$76: C38.- LVL18.B
N$77: IC11.2 R47.2 R48.1
N$78: LVL18.W R47.1
N$79: 15.P$1 C39.+
N$80: C39.- LVL14.B
N$81: IC10.6 R49.2 R50.1
N$82: LVL14.W R49.1
N$83: 16.P$1 C40.+
N$84: C40.- LVL13.B
N$85: IC10.2 R51.2 R52.1
N$86: LVL13.W R51.1
N$87: 13.P$1 C41.+
N$88: C41.- LVL15.B
N$89: IC9.6 R53.2 R54.1
N$90: LVL15.W R53.1
N$91: 14.P$1 C42.+
N$92: C42.- LVL16.B
N$93: IC9.2 R55.2 R56.1
N$94: LVL16.W R55.1
N$95: LVL17.W R45.1
N$96: 17.P$1 C37.+
N$97: R57.2 R58.2 R59.2 R60.2 R61.2 R62.2 VOL2.B
N$98: R63.1 VOL2.W
N$99: IC12.6 R63.2 R64.1
N$100: C43.+ IC12.7 R64.2 R66.1
N$101: C43.- EURO2.P$1
N$102: C44.- LINE2.P$1
N$103: C44.+ IC12.1 IC12.2
N$104: IC12.3 R65.2 R66.2
N$105: D5.C FB5.2
N$106: +2.1 D5.A
N$107: D6.A FB6.2
N$108: -2.1 D6.C
N$109: C55.- LVL23.B
N$110: IC15.6 R67.2 R68.1
N$111: 24.P$1 C56.+
N$112: C56.- LVL24.B
N$113: IC15.2 R69.2 R70.1
N$114: LVL24.W R69.1
N$115: 21.P$1 C57.+
N$116: C57.- LVL20.B
N$117: IC14.6 R71.2 R72.1
N$118: LVL20.W R71.1
N$119: 22.P$1 C58.+
N$120: C58.- LVL19.B
N$121: IC14.2 R73.2 R74.1
N$122: LVL19.W R73.1
N$123: 19.P$1 C59.+
N$124: C59.- LVL21.B
N$125: IC13.6 R75.2 R76.1
N$126: LVL21.W R75.1
N$127: 20.P$1 C60.+
N$128: C60.- LVL22.B
N$129: IC13.2 R77.2 R78.1
N$130: LVL22.W R77.1
N$131: LVL23.W R67.1
N$132: 23.P$1 C55.+
N$133: R79.2 R80.2 R81.2 R82.2 R83.2 R84.2 VOL3.B
N$134: R85.1 VOL3.W
N$135: IC16.6 R85.2 R86.1
N$136: C61.+ IC16.7 R86.2 R88.1
N$137: C61.- EURO3.P$1
N$138: C62.- LINE3.P$1
N$139: C62.+ IC16.1 IC16.2
N$140: IC16.3 R87.2 R88.2
N$141: D7.C FB7.2
N$142: +3.1 D7.A
N$143: D8.A FB8.2
N$144: -3.1 D8.C
N$145: C73.- LVL29.B
N$146: IC19.6 R89.2 R90.1
N$147: 30.P$1 C74.+
N$148: C74.- LVL30.B
N$149: IC19.2 R91.2 R92.1
N$150: LVL30.W R91.1
N$151: 27.P$1 C75.+
N$152: C75.- LVL26.B
N$153: IC18.6 R93.2 R94.1
N$154: LVL26.W R93.1
N$155: 28.P$1 C76.+
N$156: C76.- LVL25.B
N$157: IC18.2 R95.2 R96.1
N$158: LVL25.W R95.1
N$159: 25.P$1 C77.+
N$160: C77.- LVL27.B
N$161: IC17.6 R97.2 R98.1
N$162: LVL27.W R97.1
N$163: 26.P$1 C78.+
N$164: C78.- LVL28.B
N$165: IC17.2 R99.2 R100.1
N$166: LVL28.W R99.1
N$167: LVL29.W R89.1
N$168: 29.P$1 C73.+
N$169: R101.2 R102.2 R103.2 R104.2 R105.2 R106.2 VOL4.B
N$170: R107.1 VOL4.W
N$171: IC20.6 R107.2 R108.1
N$172: C79.+ IC20.7 R108.2 R110.1
N$173: C79.- EURO4.P$1
N$174: C80.- LINE4.P$1
N$175: C80.+ IC20.1 IC20.2
N$176: IC20.3 R109.2 R110.2
N$177: D9.C FB9.2
N$178: +4.1 D9.A
N$179: D10.A FB10.2
N$180: -4.1 D10.C
N$181: C91.- LVL35.B
N$182: IC23.6 R111.2 R112.1
N$183: 36.P$1 C92.+
N$184: C92.- LVL36.B
N$185: IC23.2 R113.2 R114.1
N$186: LVL36.W R113.1
N$187: 33.P$1 C93.+
N$188: C93.- LVL32.B
N$189: IC22.6 R115.2 R116.1
N$190: LVL32.W R115.1
N$191: 34.P$1 C94.+
N$192: C94.- LVL31.B
N$193: IC22.2 R117.2 R118.1
N$194: LVL31.W R117.1
N$195: 31.P$1 C95.+
N$196: C95.- LVL33.B
N$197: IC21.6 R119.2 R120.1
N$198: LVL33.W R119.1
N$199: 32.P$1 C96.+
N$200: C96.- LVL34.B
N$201: IC21.2 R121.2 R122.1
N$202: LVL34.W R121.1
N$203: LVL35.W R111.1
N$204: 35.P$1 C91.+
N$205: R123.2 R124.2 R125.2 R126.2 R127.2 R128.2 VOL5.B
N$206: R129.1 VOL5.W
N$207: IC24.6 R129.2 R130.1
N$208: C97.+ IC24.7 R130.2 R132.1
N$209: C97.- EURO5.P$1
N$210: C98.- LINE5.P$1
N$211: C98.+ IC24.1 IC24.2
N$212: IC24.3 R131.2 R132.2
N$213: D11.C FB11.2
N$214: +5.1 D11.A
N$215: D12.A FB12.2
N$216: -5.1 D12.C